# Altium PCB optoIsolatorBoard.PcbDoc
Units mil, origin at the board's own origin, x right, y up, seen from the top; angles counter-clockwise.
Board outline 1550 x 3133.75 mil, 2 copper layers (Top Layer, Bottom Layer); 40 components, 27 nets, 114 pads, 3 vias.
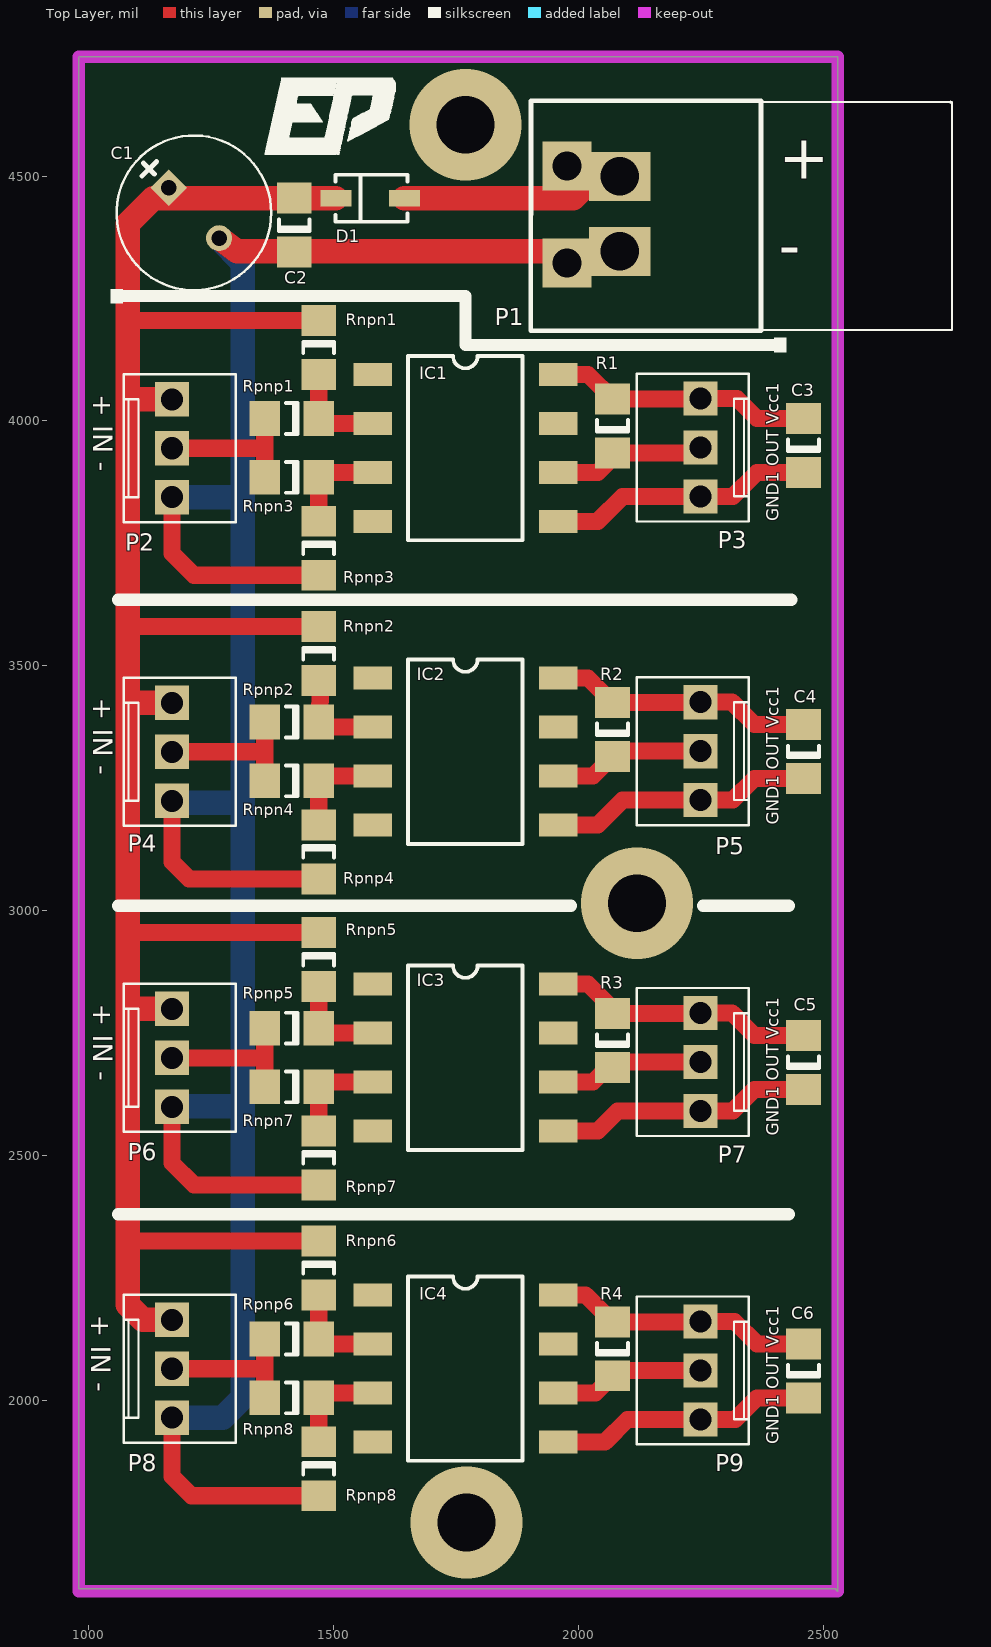
[diagram p0: Top Layer view]
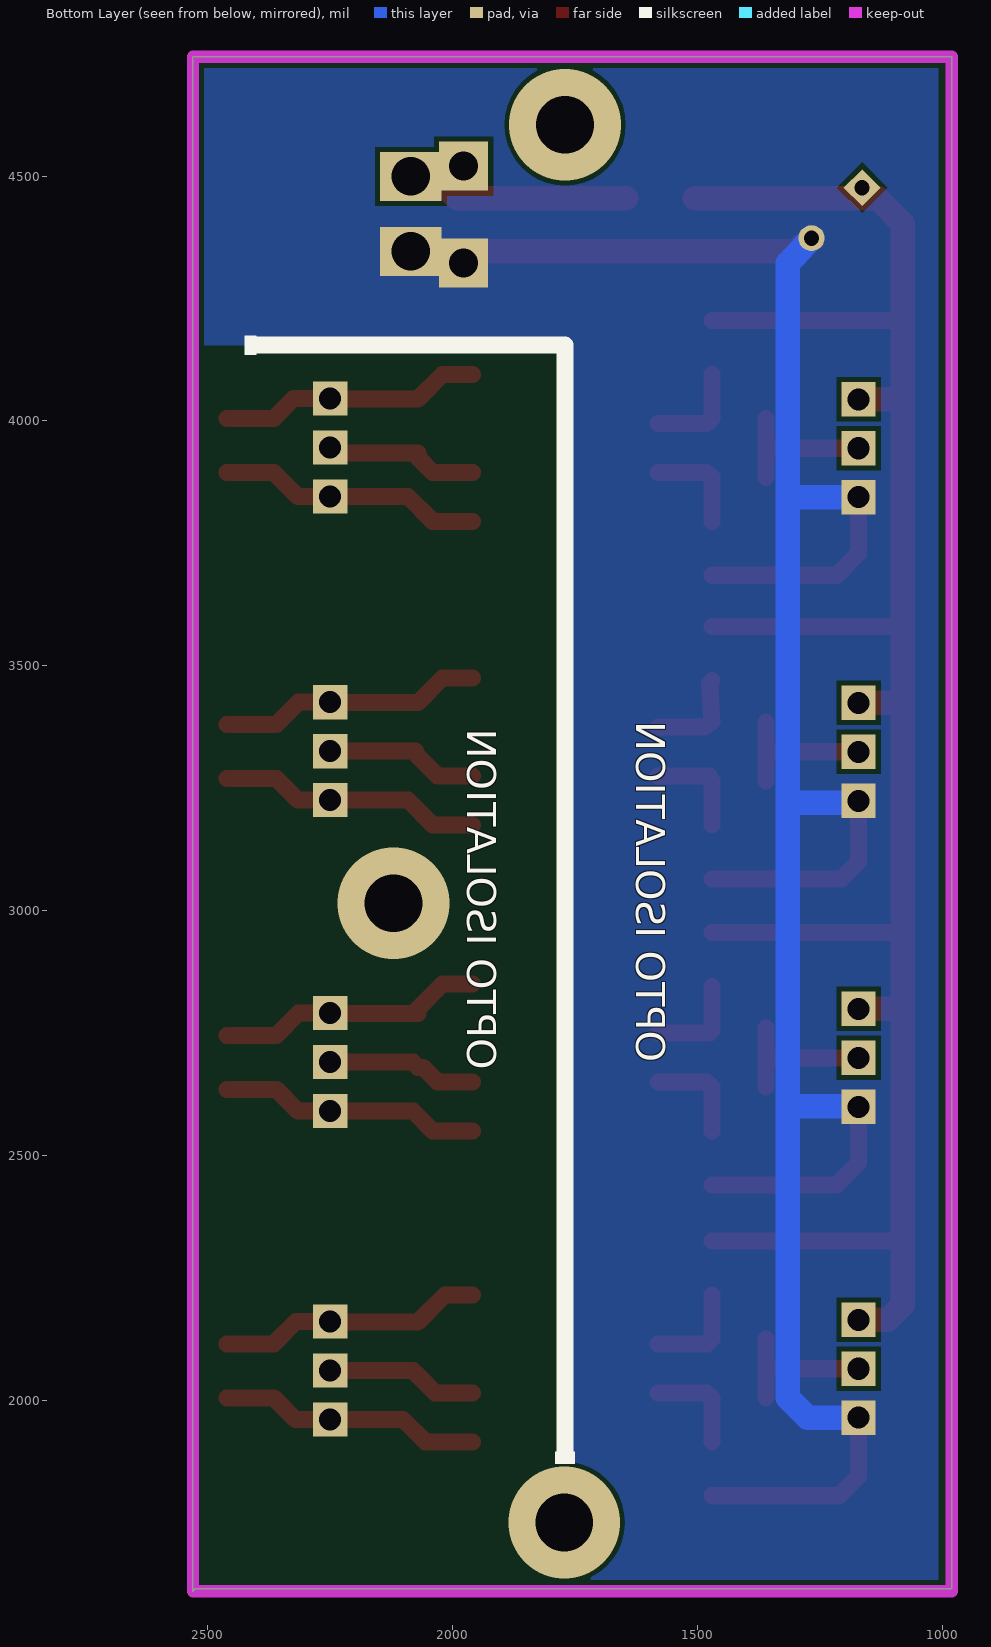
[diagram p1: Bottom Layer view, seen from below]
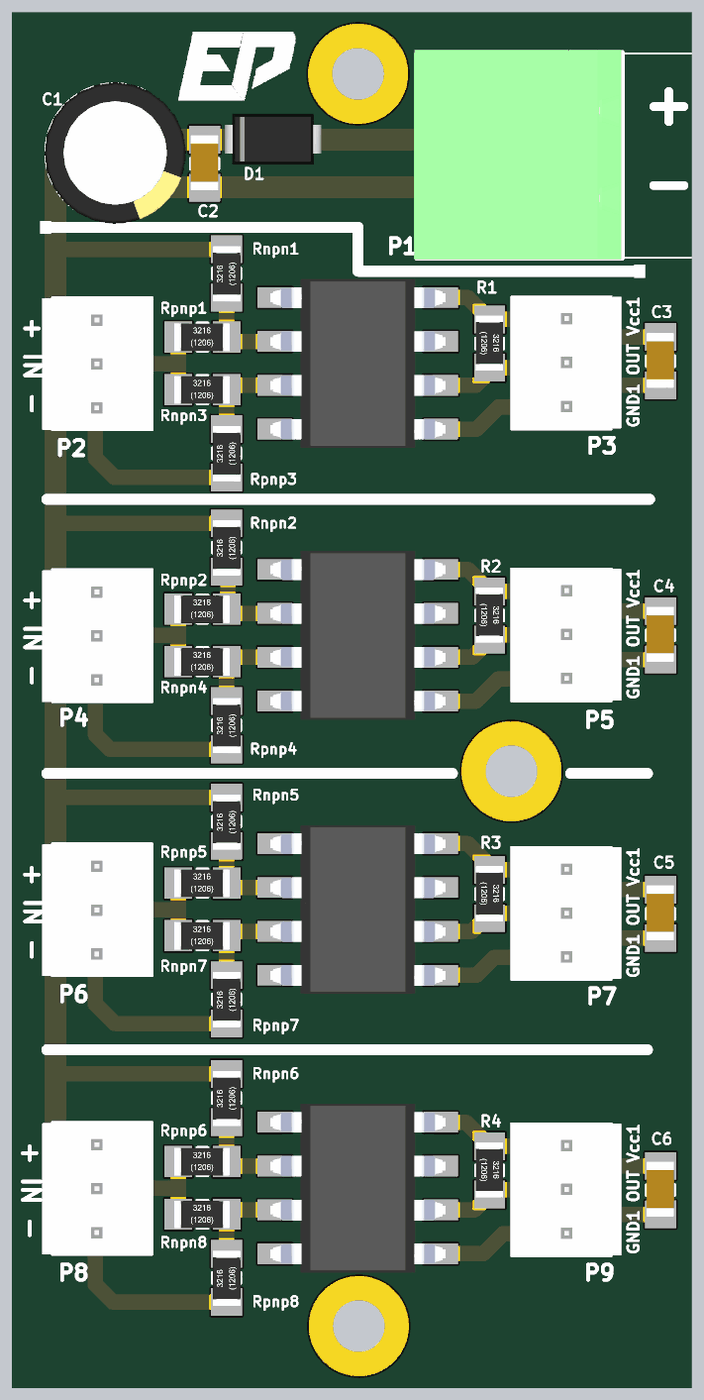
[diagram p2: 3D render of the assembled board from above, using the file's embedded part models]

## Layer stack, top to bottom
Top Layer: signal copper 1.4
Dielectric: dielectric 12.6, FR-4, Dk 4.8
Bottom Layer: signal copper 1.4

## Board outline
980,4743.75 2530,4743.75 2530,1610 2525,1615 980,1615 980,4743.75

## Design rules (kind name [scope] priority, off if disabled: settings)
Clearance [All] p1: gap=10
HoleSize [All] p1: absolutevalues=TRUE maxlimit=1000 minlimit=1 maxpercent=80.000 minpercent=20.000
MinimumSolderMaskSliver [All] p1: minsoldermaskwidth=5
PolygonConnect [All] p1: connectstyle=Direct reliefconductorwidth=10 reliefentries=4 polygonreliefangle="90 Angle" airgapwidth=10
RoutingVias [All] p1: holewidth=28 width=50 viastyle="Through Hole" minholewidth=28 minwidth=50 maxholewidth=28 maxwidth=50
SilkToSilkClearance [All] p1: silktosilkclearance=5
SilkToSolderMaskClearance [IsPad] p1: minsilkscreentomaskgap=5 clearancetoexposedcopper=TRUE
SolderMaskExpansion [All] p1: expansion=4
Width [All] p1: maxlimit=500 minlimit=10 preferedwidth=10
24 further rules are at their usual default settings.

## Components (designator, comment, footprint, x,y, rotation, side; value= is the part's Value field where it differs from the comment)
C1 "100uF" CAP4-8X10 1215,4425 r315 top
C2 "100nF" 1206_cap 1420,4400 r270 top
C3 "cap_1206" 1206_cap 2460,3950 r270 top
C4 "cap_1206" 1206_cap 2460,3325 r270 top
C5 "cap_1206" 1206_cap 2460,2690 r270 top
C6 "cap_1206" 1206_cap 2460,2060 r270 top
D1 "S1G" DO-214AC(SMA) 1575,4455 r180 top
IC1 "6N315" "dip8 smd" 1580,4095 r0 top
IC2 "6N315" "dip8 smd" 1580,3475 r0 top
IC3 "6N315" "dip8 smd" 1580,2850 r0 top
IC4 "6N315" "dip8 smd" 1580,2215 r0 top
P1 "P-200-50002-ND" Header2Combination 2170,4425 r0 top
P2 "WM18787-ND" molex_conn3 1170,3945 r180 top
P3 "WM18787-ND" molex_conn3 2250,3945 r0 top
P4 "WM18787-ND" molex_conn3 1170,3325 r180 top
P5 "WM18787-ND" molex_conn3 2250,3325 r0 top
P6 "WM18787-ND" molex_conn3 1170,2700 r180 top
P7 "WM18787-ND" molex_conn3 2250,2690 r0 top
P8 "WM18787-ND" molex_conn3 1170,2065 r180 top
P9 "WM18787-ND" molex_conn3 2250,2060 r0 top
R1 "4k7" 1206_res 2070,3990 r270 top
R2 "4k7" 1206_res 2070,3370 r270 top
R3 "4k7" 1206_res 2070,2735 r270 top
R4 "4k7" 1206_res 2070,2105 r270 top
Rnpn1 "100" 1206_res 1470,4150 r90 top
Rnpn2 "100" 1206_res 1470,3525 r90 top
Rnpn3 "0" 1206_res 1415,3885 r0 top
Rnpn4 "0" 1206_res 1415,3265 r0 top
Rnpn5 "100" 1206_res 1470,2900 r90 top
Rnpn6 "100" 1206_res 1470,2270 r90 top
Rnpn7 "0" 1206_res 1415,2640 r0 top
Rnpn8 "0" 1206_res 1415,2005 r0 top
Rpnp1 "0" 1206_res 1415,4005 r0 top
Rpnp2 "0" 1206_res 1415,3385 r0 top
Rpnp3 "100" 1206_res 1470,3740 r90 top
Rpnp4 "100" 1206_res 1470,3120 r90 top
Rpnp5 "0" 1206_res 1415,2760 r0 top
Rpnp6 "0" 1206_res 1415,2125 r0 top
Rpnp7 "100" 1206_res 1470,2495 r90 top
Rpnp8 "100" 1206_res 1470,1860 r90 top

## Footprints (in the part's own frame and the unit in brackets; to place one, negate y for a bottom-side part, rotate by r counter-clockwise, add the part's x,y. Pads: shape width x height; smd on the part's side, far side on the other; paste and mask are expansions set on the pad)
1206_cap [mm]
  rect 1.6x1.8 smd: 1(1.4,0) 2(-1.4,0)
  silkscreen extent -0.3,-0.8 0.3,0.8, body extent -1.65,-0.81 1.55,0.79, height 1
1206_res [mm]
  rect 1.6x1.8 smd: 1(1.4,0) 2(-1.4,0)
  silkscreen extent -0.3,-0.8 0.3,0.8, body extent -1.63,-0.81 1.57,0.79, height 0.55
CAP4-8X10 [mm] "Capacitor; 2 Leads"
  rect 1.35x1.35 hole 0.8: 1(-1.854,0)
  round 1.35 hole 0.8: 2(1.854,0)
  silkscreen extent -4.01,-4.01 4.01,4.01, body extent -4.07,-4.09 4.13,4.11, height 14.4
"dip8 smd" [mm]
  rect 2x1.2 smd: 1(0,0) 2(0,-2.54) 3(0,-5.08) 4(0,-7.62) 5(9.62,-7.62) 6(9.62,-5.08) 7(9.62,-2.54) 8(9.62,0)
  silkscreen extent 1.84,-8.6 7.79,0.96, body extent -0.26,-8.71 9.9,1.06, height 4.32
DO-214AC(SMA) [mm] "SOD-123; 2 Leads; Body 2.7 x 1.6 mm, (LxW)"
  rect 1.6x0.85 smd: 1(-1.776,0) 2(1.776,0)
  silkscreen extent -1.93,-1.22 1.8,1.22, body extent -2.83,-1.5 2.77,1.45, height 2.7
Header2Combination [mm]
  rect 2.54x2.54 hole 1.5: 1(-4.902,-2.606) 2(-4.902,2.423)
  rect 3.2x2.54 hole 2: 1(-2.159,-1.996) 2(-2.159,1.89)
  silkscreen extent -6.78,-6.11 15.06,5.82, body extent -6.91,-6.2 5.09,5.96, height 8.6
molex_conn3 [mil]
  rect 70x70 hole 45: 1(-0.4,100.7) 2(-0.4,0.7) 3(-0.4,-99.3)
  silkscreen extent -130,-150 98,152, body extent -129,-148 121,152, height 421

## Part data
C1: library part cap5-8x10, "electrolytic capacitor"
C2: library part cap_1206, "Capacitor"
C3 C4 C5 C6: "Capacitor"
D1: "High Conductance Fast Diode"
IC1 IC2 IC3 IC4: "Single Channel, High Speed  Optocouplers"
P1: library part Header2ConPow, "Header, 2-Pin"
P2 P3 P4 P5 P6 P7 P8 P9: library part "Molex conn3", "Header, 3-Pin"
R1 R2 R3 R4 Rnpn1 Rnpn2 Rnpn3 Rnpn4 Rnpn5 Rnpn6 Rnpn7 Rnpn8 Rpnp1 Rpnp2 Rpnp3 Rpnp4 Rpnp5 Rpnp6 Rpnp7 Rpnp8: library part res, "Resistor"

## Via types
v1: diameter 228.35, hole 118.11, Top Layer to Bottom Layer, 3 vias

## Nets (pads, with @x,y where several pads share a name; then routed paths per layer and width w, separated by ;. In a path a pad name is that pad's centre, name@x,y a point inside that pad or via, vN(x,y) a via of type N, cw(c..) or ccw(c..) an arc to the next point about the centre after c; other vN are vias at no path point)
12V: C1.1 C2.2 D1.2 P2.3 P4.3 P6.3 P8.3 Rnpn1.1 Rnpn2.1 Rnpn5.1 Rnpn6.1 | length 4585.2
  Top Layer w35: 1080,3580 1080.12,3580.12 Rnpn2.1 ; 1080,4210 1084.88,4205.12 Rnpn1.1 ; 1080.12,2325.12 Rnpn6.1 ; 1080.12,2955.12 Rnpn5.1
  Top Layer w50: 1080.7,3424.3 P4.3 ; 1080.7,4044.3 P2.3 ; 1084.3,2799.3 P6.3 ; P8.3 1110.7,2164.3 1080,2195 1080,3580 1080,4210 1080,4403.24 1131.76,4455 D1.2
GND: C1.2 C2.1 P1.1 P2.1 P4.1 P6.1 P8.1 Rpnp3.2 Rpnp4.2 Rpnp7.2 Rpnp8.2 | length 5551.4
  Top Layer w35: P8.1 1170.4,1844.6 1210.12,1804.88 Rpnp8.2 ; P6.1 1170.4,2484.6 1215.12,2439.88 Rpnp7.2 ; P4.1 1170.4,3099.6 1205.12,3064.88 Rpnp4.2 ; P2.1 1170.4,3729.6 1215.12,3684.88 Rpnp3.2
  Top Layer w50: C1.2 1303.6,4346.4 P1.1@2085,4346.4
  Bottom Layer w50: P8.1 1274.3,1964.3 1315,2005 1315,2600 ; P6.1 1171.1,2600 1315,2600 ; P4.1 1174.7,3220 1315,3220 ; P2.1 1314.3,3844.3 ; C1.2 1315,4321.76 1315,3220 ; 1315,2600 1315,3220
NetC3_1: C3.1 IC1.5 P3.3 | length 542.6
  Top Layer w35: IC1.5 2040,3795 2090.7,3845.7 P3.3 2315.7,3845.7 2364.88,3894.88 C3.1
NetC3_2: C3.2 IC1.8 P3.1 R1.2 | length 539
  Top Layer w35: IC1.8 2020.12,4095 R1.2 2249.02,4045.12 P3.1 2324.3,4045.7 2364.88,4005.12 C3.2
NetC4_1: C4.1 IC2.5 P5.3 | length 540.6
  Top Layer w35: IC2.5 2040,3175 2090.7,3225.7 P5.3 2315.7,3225.7 2359.88,3269.88 C4.1
NetC4_2: C4.2 IC2.8 P5.1 R2.2 | length 540.8
  Top Layer w35: IC2.8 2020.12,3475 R2.2 2244.02,3425.12 P5.1 2314.3,3425.7 2359.88,3380.12 C4.2
NetC5_1: C5.1 IC3.5 P7.3 | length 536.4
  Top Layer w35: IC3.5 2040,2550 2080.7,2590.7 P7.3 2315.7,2590.7 2359.88,2634.88 C5.1
NetC5_2: C5.2 IC3.8 P7.1 R3.2 | length 551
  Top Layer w35: IC3.8 2020,2850 2070,2800 R3.2 2249.02,2790.12 P7.1 2314.3,2790.7 2359.88,2745.12 C5.2
NetC6_1: C6.1 IC4.5 P9.3 | length 538.5
  Top Layer w35: IC4.5 2055,1915 2100.7,1960.7 P9.3 2320.7,1960.7 2364.88,2004.88 C6.1
NetC6_2: C6.2 IC4.8 P9.1 R4.2 | length 542.3
  Top Layer w35: IC4.8 2015.12,2215 R4.2 P9.1@2249.02,2160.12 ; P9.1 2319.3,2160.7 2364.88,2115.12 C6.2
NetD1_1: D1.1 P1.2 | length 458.5
  Top Layer w50: D1.1 1990,4455 2034.4,4499.4 P1.2@2085,4499.4
NetIC1_2: IC1.2 Rnpn1.2 Rpnp1.1 | length 204
  Top Layer w35: Rnpn1.2 1470,4005.12 Rpnp1.1 1480.12,3995 IC1.2
NetIC1_3: IC1.3 Rnpn3.1 Rpnp3.1 | length 204
  Top Layer w35: Rpnp3.1 1470,3884.88 Rnpn3.1 1480.12,3895 IC1.3
NetIC1_6: IC1.6 P3.2 R1.1 | length 317.6
  Top Layer w35: IC1.6 2040,3895 2070,3925 R1.1 2238.78,3934.88 P3.2
NetIC2_2: IC2.2 Rnpn2.2 Rpnp2.1 | length 200.1
  Top Layer w35: Rnpn2.2 1475.12,3464.76 Rpnp2.1 1485.12,3375 IC2.2
NetIC2_3: IC2.3 Rnpn4.1 Rpnp4.1 | length 205.9
  Top Layer w35: Rpnp4.1 1470.12,3200.24 Rnpn4.1 1475.12,3275 IC2.3
NetIC2_6: IC2.6 P5.2 R2.1 | length 313.8
  Top Layer w35: IC2.6 2030.12,3275 R2.1 2075.82,3325.7 P5.2
NetIC3_2: IC3.2 Rnpn5.2 Rpnp5.1 | length 210.7
  Top Layer w35: Rnpn5.2 1470,2755.12 Rpnp5.1 1475.12,2750 IC3.2
NetIC3_3: IC3.3 Rnpn7.1 Rpnp7.1 | length 204
  Top Layer w35: Rpnp7.1 1470,2639.88 Rnpn7.1 1480.12,2650 IC3.3
NetIC3_6: IC3.6 P7.2 R3.1 | length 307.7
  Top Layer w35: IC3.6 2030,2650 2059.88,2679.88 R3.1 2080.82,2690.7 P7.2
NetIC4_2: IC4.2 Rnpn6.2 Rpnp6.1 | length 204
  Top Layer w35: Rnpn6.2 1470,2125.12 Rpnp6.1 1480.12,2115 IC4.2
NetIC4_3: IC4.3 Rnpn8.1 Rpnp8.1 | length 204
  Top Layer w35: Rpnp8.1 1470,2004.88 Rnpn8.1 1480.12,2015 IC4.3
NetIC4_6: IC4.6 P9.2 R4.1 | length 309.8
  Top Layer w35: IC4.6 2035.12,2015 R4.1 2080.82,2060.7 P9.2
NetP2_2: P2.2 Rnpn3.2 Rpnp1.2 | length 309.8
  Top Layer w35: P2.2 1359.18,3944.3 1359.88,3945 ; Rnpn3.2 1359.88,3945 ; Rpnp1.2 1359.88,3945
NetP4_2: P4.2 Rnpn4.2 Rpnp2.2 | length 308.8
  Top Layer w35: P4.2 1359.18,3324.3 ; Rnpn4.2 Rpnp2.2
NetP6_2: P6.2 Rnpn7.2 Rpnp5.2 | length 309.8
  Top Layer w35: P6.2 1359.18,2699.3 1359.88,2700 ; Rnpn7.2 1359.88,2700 ; Rpnp5.2 1359.88,2700
NetP8_2: P8.2 Rnpn8.2 Rpnp6.2 | length 309.8
  Top Layer w35: P8.2 1359.18,2064.3 1359.88,2065 ; Rnpn8.2 1359.88,2065 ; Rpnp6.2 1359.88,2065
pads on no net: IC1.1 IC1.4 IC1.7 IC2.1 IC2.4 IC2.7 IC3.1 IC3.4 IC3.7 IC4.1 IC4.4 IC4.7
copper on no net:
  other v1: 1771.65,1750 2120,3015 1770,4605

## Polygon pours and split planes (outlines as drawn)
GND on Bottom Layer "gnd_bottom" (solid, remove dead copper, pour order 2): 1005,1625 1775.6,1625 1775.6,4154.64 2510,4154.64 2510,4725 1005,4725

## Keep-outs
Keep-Out Layer:
  lines w25: 980,1610 980,4743.75 2530,4743.75 2530,1610 1010,1610 980,1610

## Silkscreen, mask and mechanical layers (free items; w line width, h text height)
Top Overlay:
  drawing of 423 lines, arcs and shapes, not listed
  text "+" at 2410,4495 h90
  text "-" at 2410,4315 h90
  text "+ IN -" at 1010,4055 h40 r270
  text "GND1 OUT Vcc1" at 2410,3795 h25 r90
  text "+ IN -" at 1010,3435 h40 r270
  text "GND1 OUT Vcc1" at 2410,3175 h25 r90
  text "+ IN -" at 1010,2810 h40 r270
  text "GND1 OUT Vcc1" at 2410,2540 h25 r90
  text "+ IN -" at 1005,2175 h40 r270
  text "GND1 OUT Vcc1" at 2410,1910 h25 r90
Bottom Overlay:
  region: 2425,4135 2425,4175 2400,4175 2400,4135
  rectangle: 1750,1870 1790,1895
  lines w35: 1770,1895 1770,4155 2405,4155
  text "OPTO ISOLATION" at 1625,2690 h60 r90
  text "OPTO ISOLATION" at 1970,2675 h60 r90